# Altium PCB PCB1.PcbDoc
Units mil, origin at the board's own origin, x right, y up, seen from the top; angles counter-clockwise.
Board outline 5000 x 4000 mil, 2 copper layers (Top Layer, Bottom Layer); 8 components, 16 nets, 30 pads, 0 vias.
Unrouted connection lines stored in the file: 1.
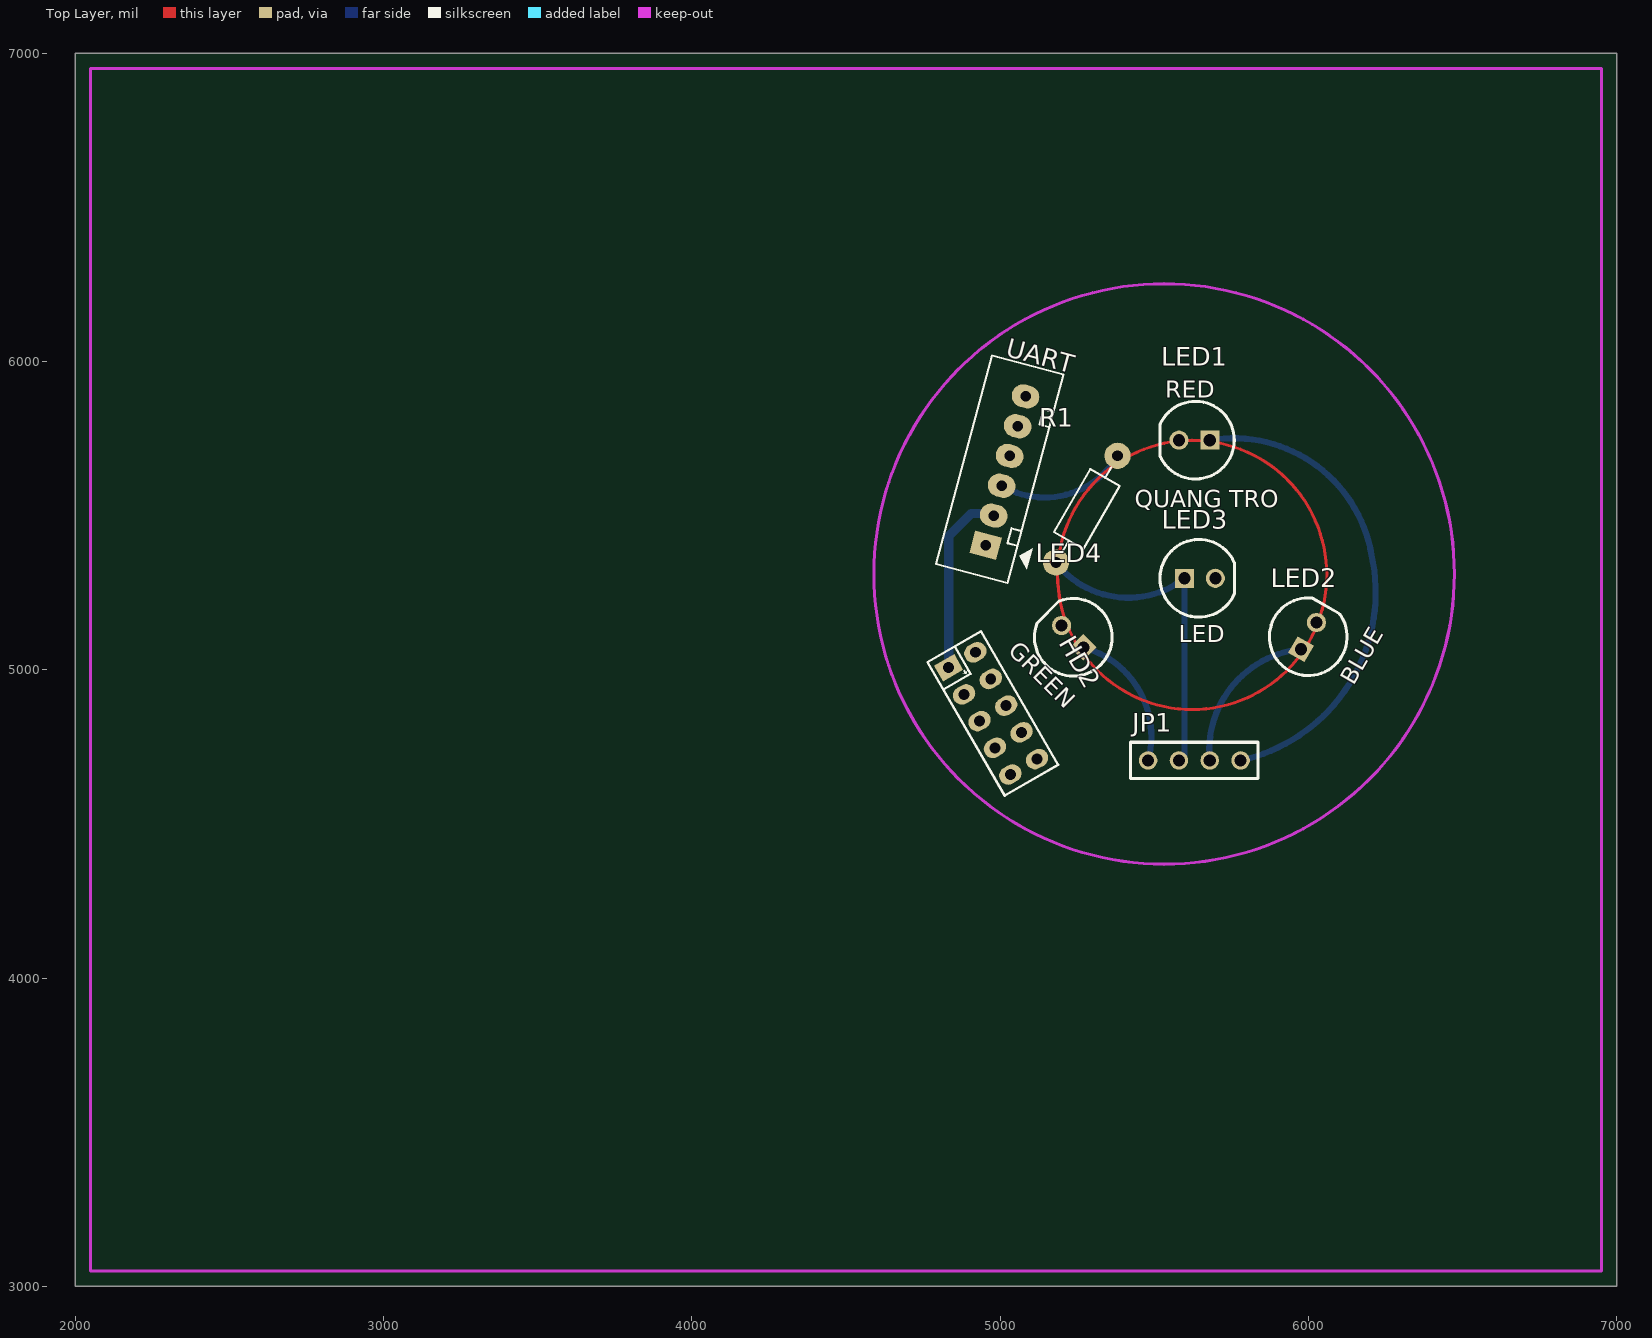
[diagram p0: Top Layer view]
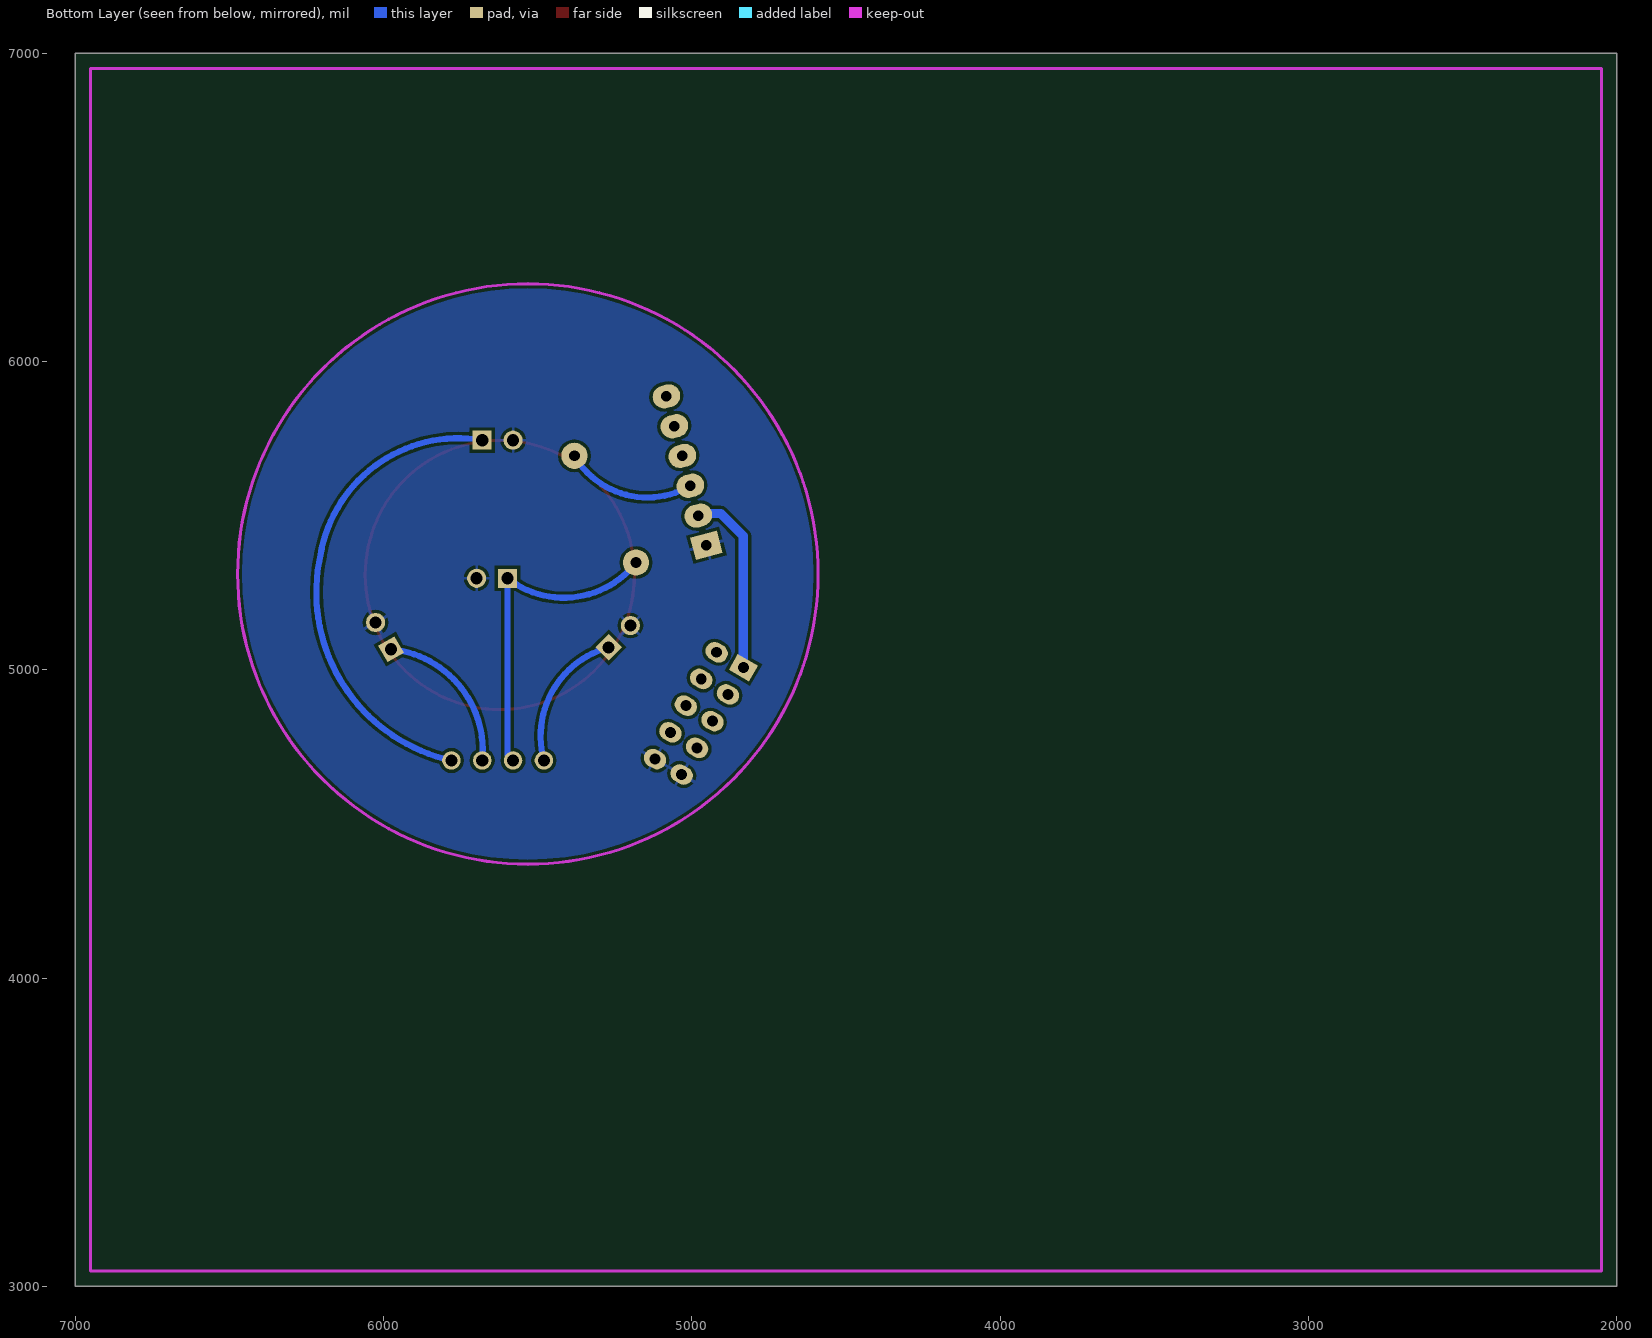
[diagram p1: Bottom Layer view, seen from below]

## Layer stack, top to bottom
Top Layer: signal copper 1.4
Dielectric: core 12.6, FR-4, Dk 4.8
Bottom Layer: signal copper 1.4

## Board outline
2000,3000 7000,3000 7000,7000 2000,7000

## Design rules (kind name [scope] priority, off if disabled: settings)
Clearance [All] p1: gap=10
PlaneClearance [All] p1: clearance=30
PolygonConnect [All] p1: connectstyle=Relief reliefconductorwidth=10 reliefentries=4 polygonreliefangle="90 Angle" airgapwidth=10
RoutingVias [All] p1: holewidth=25 width=40 viastyle="Through Hole" minholewidth=28 minwidth=50 maxholewidth=28 maxwidth=50
SolderMaskExpansion [All] p1: expansion=4
Width vcc [InNet('VCC')] p1: maxlimit=30 minlimit=30 preferedwidth=30
Width net [All] p2: maxlimit=20 minlimit=20 preferedwidth=20
27 further rules are at their usual default settings.

## Components (designator, comment, footprint, x,y, rotation, side; value= is the part's Value field where it differs from the comment)
HD2 "Header 5x2" HED2X5_cen 4833,5007 r300 top
JP1 "JP4" CON4 5580,4706 r0 top
LED1 "LED" LED_5mm 5680,5745 r180 top
LED2 "LED" LED_5mm 5976,5067 r60 top
LED3 "LED" LED_5mm 5598,5297 r0 top
LED4 "LED" LED_5mm 5270,5073 r135 top
R1 "1k" R1/2W 5181,5348 r60 top
UART "JP6" CON6 4953,5404 r75 top

## Footprints (in the part's own frame and the unit in brackets; to place one, negate y for a bottom-side part, rotate by r counter-clockwise, add the part's x,y. Pads: shape width x height; smd on the part's side, far side on the other; paste and mask are expansions set on the pad)
CON4 [mil] "4-Pin Connector; pitch 2.54mm"
  round 60 hole 39.37: 1(-100,0) 2(0,0) 3(100,0) 4(200,0)
  silkscreen extent -157,-59 256,59
CON6 [mil] "CON6"
  rect 75x90 hole 34: 1(0,0)
  oval 75x90 hole 34: 2(100,0) 3(200,0) 4(300,0) 5(400,0) 6(500,0)
  silkscreen extent -100,-150 600,140
HED2X5_cen [mm] "Connector; Header; 5x2 Position"
  rect 1.5x1.9 hole 0.9: 1(0,0)
  oval 1.5x1.9 hole 0.9: 2(2.54,0) 3(5.08,0) 4(7.62,0) 5(10.16,0) 6(0,2.54) 7(2.54,2.54) 8(5.08,2.54) 9(7.62,2.54) 10(10.16,2.54)
  silkscreen extent -1.27,-1.27 11.43,3.81, body extent -1.24,-10.02 11.46,2.86, height 5.02
LED_5mm [mil] "Led 5mm"
  rect 61.8x61.8 hole 39.37: 1(0,0)
  round 62 hole 39.37: 2(100,0)
  silkscreen extent -79,-126 162,126
R1/2W [mil] "R 1/2W, 2 pin, 300mil"
  round 85 hole 35: 1(0,0) 2(400,0)
  silkscreen extent 42,-55 356,55, body extent -12,-45 414,49, height 91

## Part data
HD2: library part HED5x2
JP1: library part Con4, "Connector 4"
LED1 LED2 LED3 LED4: "LED Single colour Green and Red"
R1: library part R, "Resistor 1/4W"
UART: library part Con6, "Connector 6"

## Nets (pads, with @x,y where several pads share a name; then routed paths per layer and width w, separated by ;. In a path a pad name is that pad's centre, name@x,y a point inside that pad or via, vN(x,y) a via of type N, cw(c..) or ccw(c..) an arc to the next point about the centre after c; other vN are vias at no path point)
5V: R1.2 UART.3 | length 3175.3
  Top Layer w10: 6059.66,5308 ccw(c5623,5308) 6059.66,5308
  Bottom Layer w20: UART.3 ccw(c5144.27,5833.92) R1.2
CS: HD2.4
GDO1: HD2.9
GDO2: HD2.8
GND: HD2.5 HD2.10 LED1.2 LED2.2 LED3.2 LED4.2 UART.1
LED0: JP1.2 LED3.1 R1.1 | length 1065.1
  Bottom Layer w20: R1.1 ccw(c5415,5531) LED3.1 5598,4724 JP1.2
LED1: JP1.4 LED1.1 | length 1601.3
  Bottom Layer w20: LED1.1@5686,5739 LED1.1 cw(c5756,5296) 6205,5372 cw(c5659.5,5251.5) JP1.4
LED2: JP1.3 LED2.1 | length 524.2
  Bottom Layer w20: JP1.3@5684,4710 JP1.3 cw(c6008.5,4738.5) LED2.1
LED3: JP1.1 LED4.1 | length 469.7
  Bottom Layer w20: LED4.1 cw(c5191.5,4784.5) JP1.1
NC: HD2.6 UART.6
RX: UART.5
SCK: HD2.7
SI: HD2.2
SO: HD2.3
TX: UART.4
VCC: HD2.1 UART.2 | length 605.8
  Bottom Layer w30: HD2.1 4833,5434 4906,5507 4972.47,5507 UART.2

## Polygon pours and split planes (outlines as drawn)
GND on Bottom Layer "Top Layer-No Net" (solid, remove dead copper, pour order 16): 4511.81,6409.45 6622.05,6409.45 6661.42,6448.82 6661.42,4283.46 6724.41,4220.47 4311.02,4220.47 4279.53,4188.98 4279.53,6397.64 4287.4,6405.51

## Keep-outs
Keep-Out Layer:
  circle w10: c5532,5311 r941.46
  lines w10: 2050,3050 6950,3050 6950,6950 2050,6950 2050,3050

## Dimensions
2050,3050 to 6950,3050 on Mechanical 1
2050,3050 to 2050,6950 on Mechanical 1

## Text inside footprints (layer, text, board x,y; h text height)
LED1: Top Overlay "RED" at 5535.43,5881.89 h56.1
LED2: Top Overlay "BLUE" at 6146.21,4947.02 h56.1 r60
LED3: Top Overlay "QUANG TRO" at 5437.01,5527.56 h56.1
LED4: Top Overlay "GREEN" at 5023.62,5059.06 h56.1 r315